# Altium PCB SLA3000-FPGA.PcbDoc (part 2 of 2)
Units mil, origin at the board's own origin, x right, y up, seen from the top; angles counter-clockwise.
Board outline 1712 x 964 mil, 4 copper layers (Top Layer, Ground, Power, Bottom Layer), stack 62.2 mil thick; 81 components, 60 nets, 407 pads, 100 vias.
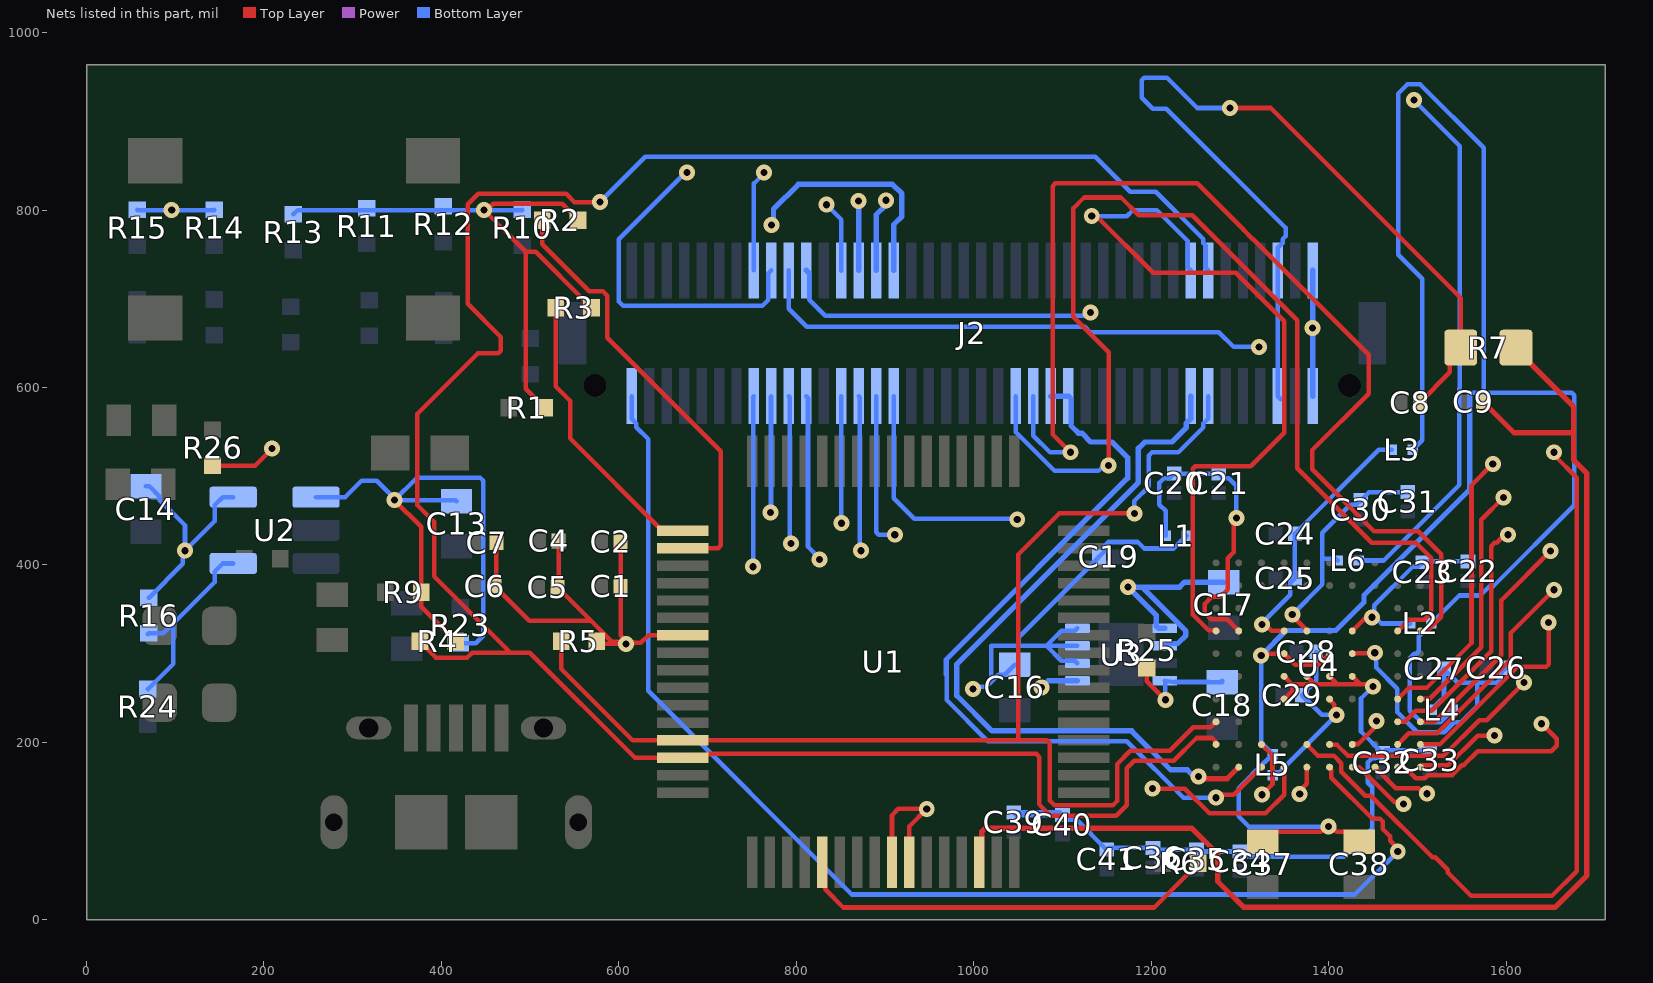
[diagram p4: the nets of this part, all layers, seen from the top]

## Via types
v1: diameter 18, hole 8, Top Layer to Bottom Layer, 100 vias

## Nets (pads, with @x,y where several pads share a name; then routed paths per layer and width w, separated by ;. In a path a pad name is that pad's centre, name@x,y a point inside that pad or via, vN(x,y) a via of type N, cw(c..) or ccw(c..) an arc to the next point about the centre after c; other vN are vias at no path point) (continued)
NetR2_1: R2.1 U1.2 | length 503.4
  Top Layer w5.12: R2.1@513.61,788.72 513.61,761.27 566.48,708.4 582.05,708.4 587.07,703.39 587.07,676.61 587.07,655.93 714.97,528.03 714.97,421.95 711.98,418.95 U1.2@672.09,418.95
NetR3_1: R3.1 U1.1 | length 324.2
  Top Layer w5.12: R3.1@528.84,690 528.84,601.16 545,585 545,542.6 648.96,438.64 U1.1@672.09,438.64
NetR6_2: R6.2 U1.21 | length 482.3
  Top Layer w5.12: U1.21@829.1,65.09 832.45,61.74 832.45,34.39 852.95,13.88 1203.53,13.88 1253.16,63.51 R6.2@1253.16,64
NetR7_2: C9.2 R7.2 U1.30 | length 1534.2
  Top Layer w6: U1.30@1006.27,65.09 1009.17,67.99 1009.17,99.61 1012.69,103.12 1245.95,103.12 1275.05,74.03 1275.05,43.32 1304.37,14 1655,14 1691,50 1691,503.22 1676,518.22 1676,547.57 ; C9.2@1574.05,584 1574.05,583.61 1578.92,578.73 1579.31,578.73 1609.1,548.95 1674.62,548.95 1676,547.57 ; R7.2@1611.1,645 1611.1,643.43 1676,578.53 1676,547.57
NetR16_1: R16.1 R24.2 U2.4 | length 222.1
  Bottom Layer w5.12: R24.2@69,260.16 69.49,260.16 98,288.67 98,332.08 96.91,333.16 ; R16.1@69,321.84 R16.1@70,322.84 86.59,322.84 96.91,333.16 ; U2.4@165.35,401.6 153.51,401.6 144.28,392.38 144.28,380.54 96.91,333.16
P1P2V: C16.2 C19.2 C37.2 C38.2 L1.1 L2.1 L3.1 L4.1 L5.1 U3.6 U3.7 U3.8 U4.E4 U4.E6 | length 2936.6
  Top Layer w5.12: C37.2@1325.59,88.18 1336.81,99.4 1390.92,99.4 1396.51,105 v1(1400,105) 1403.49,105 1409.08,99.4 1423.37,99.4 C38.2@1434.59,88.18 ; v1@1325.64,299.64 U4.E4@1349.46,299.64 ; U4.E4@1349.82,300 1362.31,287.5 1388.5,287.5 U4.E6@1401,300
  Top Layer w6: v1(1324,298) v1@1325.64,299.64 ; U4.E4@1349.46,299.64 U4.E4@1349.82,300
  Bottom Layer w5.12: v1(999,260) 1001.46,262.46 1013.83,262.46 1019.72,268.36 ; C16.2@1046,287.59 1034.78,276.37 1027.74,276.37 1019.72,268.36 ; U3.6@1116.79,289.16 1113.83,292.11 1098.7,292.11 1081.97,308.84 ; U3.7@1116.79,308.84 1081.97,308.84 ; U3.8@1116.79,328.53 1113.83,325.57 1098.7,325.57 1081.97,308.84 ; L1.1@1239.81,433 1230.65,423.84 1230.65,423.55 1225.64,418.54 1192.27,418.54 1184.98,425.83 1151.6,425.83 1146.29,420.51 1146.29,414.32 C19.2@1140.98,409 1140.98,408.61 1050.84,318.47 1050.84,308.84 ; v1(1324,298) 1324,199.81 L5.1@1337,186.81 1327.84,177.65 1327.55,177.65 1298.44,148.55 1298.44,116.73 1310.17,105 v1(1400,105) ; L3.1@1494.81,530 1505.4,540.58 1505.4,722.45 1478.44,749.41 1478.44,931.27 1488.73,941.56 1503.27,941.56 1574.81,870.03 1574.81,594.19 ; L4.1@1539.81,237 1530.65,227.84 1529.55,226.74 1529.55,226.45 1525.64,222.54 1504.64,222.54 1491.52,235.65 1491.52,294.81 1496.53,299.83 1498.64,299.83 1501.64,302.82 1501.64,319.54 1512.46,330.36 1512.46,330.65 L2.1@1515.81,334 1547.35,365.54 1570.85,365.54 1581.48,376.17 1585.73,376.17 1677,467.44 1677,591.19 1674,594.19 1574.81,594.19 ; 1559,594.19 1574.81,594.19 ; 1019.72,268.36 1019.72,308.84 1050.84,308.84 ; 1050.84,308.84 1081.97,308.84
  Bottom Layer w6: v1(1324,298) 1352,326 1408,326 1439.91,357.91 1439.91,365.8 1559,484.89 1559,594.19
"P1P2V GPLL": C28.2 C29.2 L5.2 U4.G6 | length 225.2
  Top Layer w5.12: U4.G6@1401,248.82 1401,248.07 1406.54,242.54 1406.54,233.46 v1(1409,231)
  Bottom Layer w5.12: L5.2@1337,163.19 1340.35,166.54 1344.54,166.54 1350.35,172.35 v1(1409,231) 1392.02,231 1375.73,247.29 1375.34,247.29 1370.02,252.61 C29.2@1370.02,253 1370.02,253.39 1386.02,269.39 C28.2@1386.02,302
"P1P2V PHY0": C26.2 C27.2 L4.2 U4.E7 | length 387.5
  Top Layer w5.12: U4.E7@1426.59,300 1427.09,300.5 1451.5,300.5 v1(1452,301)
  Bottom Layer w5.12: v1(1452,301) 1453.51,299.49 1453.51,284.32 1477.25,260.58 1477.25,234.2 1500.03,211.42 1530.24,211.42 1541.36,222.54 1549.26,222.54 1567.4,240.68 1567.4,267.17 ; L4.2@1516.19,237 1525.35,246.16 1525.35,246.45 1530,251.1 C27.2@1530,282.61 ; C27.2@1524.68,277.69 C27.2@1530,283 C27.2@1530,282.61 ; C26.2@1600,284 1594.68,278.69 1594.68,272.49 1589.37,267.17 1567.4,267.17 ; C27.2@1530,282.61 1545.43,267.17 1567.4,267.17
"P1P2V PHY1": C24.2 C25.2 L3.2 U4.D4 | length 294
  Top Layer w5.12: v1(1325,333) 1328.49,333 1335.9,325.59 U4.D4@1349.82,325.59
  Bottom Layer w5.12: v1(1325,333) 1325,334.83 1356.71,366.54 1356.71,379.69 C25.2@1362.02,385 C24.2@1362.02,435 1362.02,435.39 1456.63,530 L3.2@1471.19,530
"P1P2V PLL0": C22.2 C23.2 L2.2 U4.D7 | length 215.6
  Top Layer w5.12: U4.D7@1426.59,325.59 1439.54,338.54 1446.54,338.54 v1(1449,341)
  Bottom Layer w5.12: L2.2@1492.19,334 1459.49,334 1452.49,341 v1(1449,341) 1451.46,343.46 1451.46,354.69 1494.49,397.71 1500.68,397.71 C23.2@1506,403.02 1507,404.02 C22.2@1557,404.02
"P1P2V PLL1": C20.2 C21.2 L1.2 U4.D2 | length 369.9
  Top Layer w5.12: v1(1296,453) 1292.82,449.82 1292.82,414.22 1286.14,407.54 1286.14,372.19 1277.92,363.98 1268.17,363.98 1260.55,356.36 1260.55,346.01 1267.87,338.69 1285.54,338.69 U4.D2@1298.64,325.59
  Top Layer w6: U4.D2@1298.13,325.59 U4.D2@1298.64,325.59
  Bottom Layer w5.12: L1.2@1216.19,433 1216.19,460.86 1209.17,467.88 1209.17,492.4 1214.49,497.71 1220.68,497.71 C20.2@1226,503.02 C21.2@1276,503.02 1281.32,497.71 1287.51,497.71 1296,489.22 v1(1296,453)
P1P8V: C17.2 J2.79 J2.80 U3.1 U3.2 U3.5 | length 467.2
  Bottom Layer w6: v1(1076.21,262) 1083.68,269.47 U3.5@1116.79,269.47 ; U3.2@1215.21,308.84 1217.72,311.35 1229.9,311.35 1239.06,320.51 1239.06,325.49 1189.54,375 ; U3.1@1215.21,328.53 1208.13,328.53 1205.61,331.04 1205.61,343.39 v1(1174,375) 1189.54,375 ; C17.2@1282,380.59 1237.59,380.59 1232,375 1189.54,375 ; J2.79@1382.19,590.22 1382.09,590.32 1382.09,666.91 v1(1382,667) 1382.09,667.09 1382.09,731.86 J2.80@1382.19,731.95
P2P5V: C14.2 L6.1 R16.2 U2.5 | length 862.3
  Bottom Layer w5.12: C14.2@67,488.59 70.94,488.59 82.16,477.37 82.16,473.43 111,444.59 v1(111,416) ; R16.2@70,363.16 70.49,363.16 108.54,401.2 108.54,413.54 v1(111,416) ; U2.5@165.35,476.4 153.51,476.4 144.28,467.18 144.28,449.28 v1(111,416) ; L6.1@1430.46,408.35 L6.1@1433.81,405 1462.27,405 1547.44,490.17 1547.44,598.98 1548,599.54 1548,872 v1(1496,924)
"P2P5V AUX": C30.2 C31.2 L6.2 U4.D5 | length 264.5
  Top Layer w5.12: v1(1359,344) 1359,342.75 1375.41,326.34 U4.D5@1375.41,325.59
  Bottom Layer w5.12: v1(1359,344) 1392.98,377.98 1392.98,407.07 ; L6.2@1410.19,405 1408.11,407.07 1392.98,407.07 ; C31.2@1489,482.02 1445.42,482.02 1436.39,473 C30.2@1436,473 1430.68,467.69 1424.49,467.69 1392.98,436.17 1392.98,407.07
"P3P3V FT": C1.2 C2.2 C4.2 C5.2 C6.2 C7.2 C8.2 C13.2 C18.2 C32.2 C33.2 C34.2 C35.2 C36.2 C39.2 C40.2 C41.2 J2.75 J2.76 R1.2 R2.2 R3.2 R4.2 R5.2 R7.1 R9.2 R10.2 R11.2 R12.2 R13.2 R14.2 R15.2 R23.1 R25.2 R26.2 U1.7 U1.25 U1.26 U2.1 U3.4 U4.F4 U4.F5 U4.F6 U4.F7 U4.G4 | length 4362.3
  Top Layer w5.12: R26.2@142,512 190,512 v1(209,531) ; v1(347,473) 377.16,442.84 R9.2@377.16,369 377.16,353 408.87,321.28 409.37,321.28 416.16,314.49 R4.2@416.16,314 ; C7.2@462.02,425 462.02,378 C6.2@460.02,376 460.02,375.61 465.34,370.29 465.73,370.29 498.92,337.1 568.53,337.1 ; R1.2@516.16,577 516.16,577.49 495,598.65 495,753 ; C4.2@532.02,427 532.02,375.61 531.02,374.61 568.53,337.1 ; R2.2@553.92,788.72 553.92,789.22 536.01,807.13 458.61,807.13 451.49,800 v1(448,800) 495,753 ; R3.2@569.16,690 569.16,690.49 562.37,697.28 561.87,697.28 506.16,753 495,753 ; R5.2@575.16,314 578.16,311 v1(608,311) ; C2.2@602.05,426 C1.2@602.05,376 602.05,320.44 608,314.49 v1(608,311) ; U1.7@672.09,320.53 633,320.53 624.68,312.21 609.21,312.21 v1(608,311) ; U1.25@907.84,65.09 907.84,117.84 915,125 v1(947,125) 927.53,105.53 U1.26@927.53,65.09 ; R25.2@1195,283.84 1195,269 v1(1216,248) ; v1(1289,915) 1334.72,915 1548.9,700.83 R7.1@1548.9,645 1536.65,632.76 1536.65,617 1503.05,583.39 C8.2@1503.05,583 ; U4.G4@1349.82,248.82 1358.76,257.76 1358.76,265.46 ; U4.F4@1349.82,274.41 1358.76,265.46 ; U4.F5@1375.41,274.41 1384.35,265.46 ; U4.F6@1401,274.41 1409.94,265.46 ; U4.F7@1426.59,274.41 1435.54,265.46 ; v1(1450,263) 1447.54,265.46 1435.54,265.46 ; 568.53,337.1 592.17,313.46 605.54,313.46 v1(608,311) ; 1358.76,265.46 1384.35,265.46 ; 1384.35,265.46 1409.94,265.46 ; 1409.94,265.46 1435.54,265.46
  Power w5.12: v1@1287.5,916.5 v1(1289,915)
  Bottom Layer w5.12: R15.2@57.36,800.16 57.52,800 v1(96,800) 143.93,800 R14.2@144.09,800.16 ; R13.2@233,795.16 237.84,800 v1(448,800) 490.84,800 R10.2@491,800.16 ; U2.1@258.65,476.4 291.4,476.4 310,495 327,495 347,475 v1(347,473) ; C13.2@417,472 416,473 v1(347,473) ; R23.1@421,311.84 438.84,311.84 447,320 447,495 444,498 372,498 v1(347,473) ; v1(1216,248) 1216,268.69 U3.4@1215.21,269.47 1226.63,268.03 1264.84,268.03 C18.2@1280,267.59 ; C35.2@1251,79.02 1204,79.02 C36.2@1202,81.02 1152,81.02 C41.2@1150,79.02 1149.61,79.02 1115.92,112.71 1105.32,112.71 C40.2@1100,118.02 ; C35.2@1251,80.02 1254,77.02 C34.2@1300,77.02 1305.32,71.71 1308.41,71.71 1308.71,71.41 1311.81,71.41 1312.22,71 1417.28,71 1449.19,102.91 1449.19,149.54 1444.17,154.56 1444.17,177.4 1449.19,182.41 1452.29,182.41 1452.59,182.71 1455.68,182.71 C32.2@1461,188.02 1464,191.02 C33.2@1514,191.02 ; C18.2@1279.04,268.88 C18.2@1280,269.59 ; v1(1289,915) 1252,915 1217.67,949.33 1192.18,949.33 1189.19,946.33 1189.19,926.75 1201.73,914.21 1217.07,914.21 1351.39,779.89 1351.39,770.34 1348.04,766.99 1348.04,762.76 1342.82,757.54 J2.76@1342.82,731.95 J2.75@1342.82,590.22 J2.75@1346.17,586.87 ; v1(1450,263) 1436.44,249.44 1436.44,212.19 C32.2@1460.61,188.02 ; C40.2@1100,118.02 1048,118.02 C39.2@1045,121.02 1097,121.02 C40.2@1100,118.02
RX: J2.65 U4.K2 | length 826.3
  Top Layer w6: v1(1253.22,161.54) 1255.65,159.11 1285.7,159.11 U4.K2@1298.64,172.05
  Bottom Layer w6: J2.65@1244.39,590.22 1244.39,564.63 1239.61,559.85 1239.61,558.21 1239.61,555 1223.22,538.61 1192.78,538.61 1185.5,531.33 1185.5,492.91 981,288.41 981,252.54 1020.54,213 1178,213 1222,169 1240.62,169 1248.08,161.54 v1(1253.22,161.54)
SCL: J2.67 R5.1 U1.13 U4.H1 | length 1477.9
  Top Layer w5.12: R5.1@534.84,314 534.84,283.02 615.44,202.42 U1.13@672.09,202.42 1050,202.42 ; v1(1181,458) 1096.23,458 1050,411.77 1050,202.42 ; U4.H1@1273.05,223.23 1266.75,216.93 1247.39,216.93 1220.9,190.44 1176.44,190.44 1161.5,175.5 1161.5,133.91 1156.49,128.9 1091.33,128.9 1085.88,134.35 1085.88,198.91 1082.36,202.42 1050,202.42
  Bottom Layer w5.12: v1(1181,458) 1181,472.06 1197.06,488.12 1197.06,523.2 1200.91,527.05 1230.73,527.05 1258.86,555.18 1258.86,558.29 1258.86,559.41 1264.08,564.63 J2.67@1264.08,590.22
SDA: J2.68 R4.1 U1.14 U4.J1 | length 2635.2
  Top Layer w5.12: R4.1@375.84,314 375.84,313.51 393.75,295.6 429.05,295.6 434.65,301.19 477.81,301.19 ; v1(578.59,808.94) 549.92,808.94 540.62,818.24 441.41,818.24 429.55,806.39 429.55,694.28 467,656.83 467,641.44 464,638.44 441.16,638.44 373,570.28 373,467.44 392,448.44 392,387 477.81,301.19 ; U1.14@672.09,182.73 618.16,182.73 499.7,301.19 477.81,301.19 ; U1.14@674.99,185.64 700.27,185.64 701.64,187 1070.36,187 1073.88,183.49 1073.88,130 1086.54,117.34 1160.65,117.34 1172.62,129.3 1172.62,170.9 1181.05,179.32 1225.5,179.32 1251.11,204.93 1268.6,204.93 1272.69,200.84 U4.J1@1272.69,198
  Top Layer w6: U1.14@672.09,182.73 U1.14@674.99,185.64 ; U4.J1@1272.69,198 U4.J1@1273.05,197.64
  Bottom Layer w5.12: v1(578.59,808.94) 629.65,860 1137.02,860 1176.37,820.65 1205.21,820.65 1258.86,766.99 1258.86,763.89 1258.86,762.76 1261.17,760.45 J2.68@1261.17,734.86
  Bottom Layer w6: J2.68@1261.17,734.86 J2.68@1264.08,731.95
TX: J2.66 U4.D1 | length 869.7
  Top Layer w5.12: v1(1133,793.06) 1138.38,793.06 1202.32,729.12 1295.44,729.12 1350,674.56 1350,549.17 1312.12,511.28 1249.75,511.28 1246.76,508.29 1246.76,344.08 1264.72,326.12 1272.52,326.12 U4.D1@1273.05,325.59
  Bottom Layer w5.12: v1(1133,793.06) 1172.57,793.06 1179.51,800 1206.17,800 1241.05,765.12 1241.05,735.3 J2.66@1244.39,731.95
VIN_ACLK: J2.1 U4.K6 | length 1431.8
  Top Layer w5.12: U4.K6@1401,172.05 1401,171.3 1402.98,169.32 1402.98,160.3 1449.39,113.88 1457.87,113.88 1460.87,110.88 1460.87,102.41 1469.33,93.95 1469.33,88.94 1477.88,80.38 v1(1477.88,76.9)
  Bottom Layer w5.12: J2.1@614.47,590.22 614.47,564.63 619.69,559.41 619.69,555.18 633,541.87 633,258 862.44,28.56 1429.55,28.56 v1(1477.88,76.9)
VIN_D0: J2.32 U4.K4 | length 469.8
  Top Layer w5.12: v1(1201.3,147.87) 1237.84,147.87 1265.66,120.05 1328.88,120.05 1349.82,140.99 U4.K4@1349.82,172.05
  Bottom Layer w6: v1(772,783) 774.25,785.25 774.25,801 802.25,829 908.46,829 919,818.46 919,792.63 909.75,783.37 J2.32@909.75,731.95
VIN_D1: J2.31 U4.K9 | length 495.8
  Top Layer w5.12: U4.K9@1477.77,172.05 1485.69,172.05 1498.19,159.55 1508.54,159.55 1511.89,162.91 1539.07,162.91 1550.19,174.02 1552.02,174.02 1568,190 1651,190 1657,196 1657,204 v1(1640,221)
  Bottom Layer w5.12: J2.31@909.75,590.22 909.75,475.25 932.82,452.18 1047.82,452.18 v1(1049,451)
VIN_D2: J2.30 U4.J5 | length 960.1
  Top Layer w5.12: U4.J5@1375.41,197.64 1387.91,185.14 1405.58,185.14 1414.09,176.62 1414.09,166.87 1441.09,139.88 1447.6,139.88 1517.02,70.46 1520.1,70.46 1534.12,56.44 1534.12,53.36 1560.47,27 1651.65,27 1679.44,54.79 1679.44,498.43 1654,523.87 v1(1654,527)
  Bottom Layer w6: J2.30@890.06,731.95 890.06,794.92 901,805.86 v1(901,811)
VIN_D3: J2.29 U4.K10 | length 273.8
  Top Layer w5.12: U4.K10@1503.36,172.05 1504.11,172.05 1506.08,174.02 1534.46,174.02 1568,207.56 v1(1587,207.56)
  Bottom Layer w5.12: J2.29@890.06,590.22 890.06,436.94 893.06,433.94 910.94,433.94 v1(911,434)
VIN_D4: J2.28 U4.K5 | length 111.6
  Top Layer w5.12: v1(1367.38,142) 1367.38,145.49 1375.41,153.52 U4.K5@1375.41,172.05
  Bottom Layer w6: v1(870,810) 870.19,809.81 870.19,732.14 J2.28@870.38,731.95
VIN_D5: J2.27 U4.J10 | length 404.4
  Top Layer w5.12: U4.J10@1503.36,197.64 1525.25,197.64 1612.62,285 1645,285 1648,288 v1(1648,335)
  Bottom Layer w5.12: J2.27@870.38,590.22 871.69,588.91 871.69,417.31 v1(873,416)
VIN_D6: J2.26 U4.J3 | length 148.3
  Top Layer w5.12: U4.J3@1324.23,197.64 1336.72,185.14 1336.72,152.86 1325,141.14 v1(1325,141)
  Top Layer w6: U4.J3@1324,197.27 1324,197.41 U4.J3@1324.23,197.64
  Bottom Layer w5.12: v1(834,806) 850.69,789.31 J2.26@850.69,731.95 J2.26@850.85,731.8
VIN_D7: J2.25 U4.J9 | length 409.3
  Top Layer w5.12: U4.J9@1477.77,197.64 1490.39,210.26 1522.15,210.26 1605.47,293.58 1605.47,323.47 v1(1654,372)
  Bottom Layer w5.12: J2.25@850.69,590.22 850.85,590.07 850.85,447.15 v1(851,447)
VIN_D8: J2.22 U4.J6 | length 619.3
  Top Layer w5.12: U4.J6@1401,197.64 1401.53,197.11 1409.45,197.11 1421.41,185.14 1529.86,185.14 1569.78,225.06 1577.99,225.06 v1(1620.37,267.44)
  Bottom Layer w5.12: J2.22@814.23,729.05 814.67,728.61 814.67,698.79 832.68,680.78 1124.27,680.78 1128.19,684.7 v1(1131.68,684.7)
  Bottom Layer w6: J2.22@811.32,731.95 J2.22@814.23,729.05
VIN_D9: J2.21 U4.H10 | length 453.1
  Top Layer w5.12: U4.H10@1503.36,223.23 1519.4,223.23 1594.35,298.18 1594.35,328.08 1594.35,359.97 v1(1650.19,415.81)
  Bottom Layer w5.12: J2.21@811.32,590.22 813.16,588.38 813.16,420.37 826,407.53 v1(826,406)
VIN_D10: J2.20 U4.K7 | length 665.9
  Top Layer w5.12: U4.K7@1426.59,172.05 1434.51,172.05 1473.65,132.91 1482.06,132.91 v1(1484.52,130.44)
  Bottom Layer w5.12: J2.20@791.64,731.95 791.64,688.74 811.94,668.45 1125.05,668.45 1131.05,662.44 1276.28,662.44 1293.04,645.68 v1(1321.32,645.68)
VIN_D11: J2.19 U4.H9 | length 448.1
  Top Layer w5.12: U4.H9@1477.77,223.23 1485.69,223.23 1498.19,235.72 1516.17,235.72 1583.24,302.79 1583.24,348.96 1583.24,421.24 1586.86,424.86 1589.37,424.86 1598.51,434 v1(1602,434)
  Bottom Layer w5.12: J2.19@791.64,590.22 792.82,589.04 792.82,425.18 v1(794,424)
VIN_D12: J2.18 U4.J7 | length 427.8
  Top Layer w5.12: U4.J7@1426.59,197.64 1427.12,198.17 1433.45,198.17 1451.54,216.25 1451.54,221.54 v1(1454,224)
  Bottom Layer w5.12: v1(677,842.44) 675.46,842.44 600.01,766.99 600.01,696.91 605.02,691.9 761.72,691.9 768.61,698.79 768.61,728.61 J2.18@771.95,731.95
VIN_D13: J2.17 U4.G10 | length 403.5
  Top Layer w5.12: U4.G10@1503.36,248.82 1503.89,249.35 1514.07,249.35 1572.12,307.39 1572.12,451.12 v1(1597,476)
  Bottom Layer w5.12: v1(771,459) 771.48,459.48 771.48,589.74 J2.17@771.95,590.22
VIN_D14: J2.16 U4.K8 | length 186
  Top Layer w5.12: U4.K8@1452.18,172.05 1475.8,148.43 1501.3,148.43 1507.61,142.13 v1(1510.74,142.13)
  Bottom Layer w5.12: J2.16@752.27,731.95 752.27,829.98 763.39,841.1 v1(763.39,842.44)
VIN_D15: J2.15 U4.G9 | length 514
  Top Layer w5.12: U4.G9@1477.77,248.82 1490.27,261.31 1510.31,261.31 1561,312 1561,489.87 v1(1585,513.87)
  Bottom Layer w5.12: v1(751,398) 751.63,398.63 751.63,589.59 J2.15@752.27,590.22
VINA_FLD: J2.49 J2.51 U4.K3 | length 905.8
  Top Layer w5.12: v1(1272.93,137.61) 1276.25,140.93 1293.11,140.93 U4.K3@1324.23,172.05
  Bottom Layer w5.12: 969,276.85 969.44,276.41 969.44,247.76 1015.76,201.44 1172.56,201.44 1236.39,137.61 v1(1272.93,137.61)
  Bottom Layer w6: 969,276.85 969,293.38 1173.5,497.88 1173.5,520.91 1155.8,538.61 1131.73,538.61 1121.84,548.5 1117.88,548.5 1109.5,556.87 1109.5,587.32 J2.51@1106.6,590.22 J2.49@1086.91,590.22
VINA_HSYNC: J2.45 U4.D9 | length 1255.2
  Top Layer w5.12: v1(1152,512) 1152,639.55 1111.94,679.61 1111.94,801.78 1124.28,814.12 1165.88,814.12 1186,794 1246.28,794 1364.44,675.84 1364.44,509 1448.44,425 1498.4,425 1515.86,407.54 1515.86,346.01 1507.94,338.09 1490.27,338.09 U4.D9@1477.77,325.59
  Bottom Layer w5.12: J2.45@1047.54,590.22 1047.54,549.73 1091.34,505.94 1140.56,505.94 1146.62,512 v1(1152,512)
VINA_VSYNC: J2.47 U4.D10 | length 1281.4
  Top Layer w5.12: v1(1109,527) 1089,547 1089,827 1092,830 1252,830 1304.16,777.84 1304.16,777.45 1314.45,767.16 1314.84,767.16 1445.09,636.91 1445.09,593.1 1381.44,529.46 1381.44,507.73 1451.17,438 1501.12,438 1526.98,412.14 1526.98,341.4 1511.69,326.12 1503.89,326.12 U4.D10@1503.36,325.59
  Bottom Layer w5.12: J2.47@1067.23,590.22 1067.23,545.77 1086,527 v1(1109,527)
pads on no net: J1.S1 J1.S2 J1.S3 J1.S4 J1.S5 J1.S6 J2.2 J2.5 J2.6 J2.7 J2.8 J2.9 J2.10 J2.11 J2.12 J2.35 J2.36 J2.37 J2.38 J2.39 J2.40 J2.41 J2.42 J2.46 J2.48 J2.50 J2.52 J2.55 J2.56 J2.57 J2.58 J2.59 J2.60 J2.61 J2.62 J2.H1 J2.H2 J2.M1 J2.M2 U1.4 U1.5 U1.8 U1.9 U1.10 U1.11 U1.12 U1.15 U1.16 U1.17 U1.29 U1.31 U1.32 U1.33 U1.34 U1.35 U1.36 U1.37 U1.38 U1.39 U1.40 U1.41 U1.42 U1.43 U1.44 U1.45 U1.46 U1.47 U1.48 U1.49 U1.50 U1.51 U1.52 U1.53 U1.54 U1.55 U1.56 U1.57 U1.58 U1.59 U1.60 U1.61 U1.62 U1.63 U1.64 U4.A1 U4.A2 U4.A3 U4.A4 U4.A5 U4.A6 U4.A7 U4.A8 U4.A9 U4.A10 U4.B1 U4.B2 U4.B3 U4.B4 U4.B5 U4.B6 U4.B7 U4.B8 U4.B9 U4.B10 U4.E9 U4.E10 U4.G1 U4.J4 U4.J8 U4.K1

## Polygon pours and split planes (outlines as drawn)
P1P2V on Power "P1P2V-pwrlayer" (solid, pour order 9): 1157,317 1069,229 1022,276 977,276 1069,211 1138,280 1342,280 1342,317
VIN_D8 on Power "VIN_D8" (solid, pour order 36): 1650,285 1650,245 1647,248 1533,248 1533,356 1470.95,424.05 1467.95,421.05 ccw(c1460.86,413.98) 1460.83,423.99 cw(c1460.82,454.08) 1435.72,437.49 cw(c1507.38,484.91) 1426.84,514.85 ccw(c1335.22,554.37) 1435,554.42 cw(c1451.58,554.42) 1451.58,571 ccw(c1451.58,579.42) 1460,579.42 1460,710 ccw(c1430.01,710.01) 1430,740 1260,740 1198,678 1161,676 1140,668 cw(c1136.33,704.15) 1113.36,676 cw(c1150.2,685.09) 1117.73,704.73 cw(c1135.2,687.37) 1135.2,712 1210,712 1244,746 1448.1,746 cw(c1448.13,722.17) 1465,739 cw(c1445.79,719.73) 1473,719.69 1473,574 cw(c1453,574) 1453,554 ccw(c1452.99,541.63) 1440.61,541.61 cw(c1341.57,550.3) 1435.08,516.51 1433.3,511.57 ccw(c1500.92,495.01) 1474.33,430.67 1544,361 1544,288 1550,288 1628,285
VIN_D1 on Power "VIN_D1" (solid, pour order 34): 1657,238.96 1657,199 1613,199 1613,230 1515,235 1514,347 1480.75,394.94 1457.72,407 1386.93,407 1390,493.02 ccw(c1389,519.99) 1409,501.86 1409,581 1418.62,581 ccw(c1418.62,625.38) 1450,594 ccw(c1418.7,594.03) 1440.81,616.19 1437,620 1437,691.32 ccw(c1393.48,676.43) 1394.84,722.41 1302.32,725.19 1067,437 cw(c1054.96,449) 1054.93,432 1033,432 cw(c1040.26,439.25) 1030,439.24 1030,469.58 1043.73,502.73 1204.26,663.26 cw(c1317.43,608.6) 1271.11,725.44 1288.66,734 1388.57,734 1450,708.55 1450,614.84 cw(c1409.43,594.09) 1455,594 cw(c1440.65,593.94) 1450.76,583.76 1443,576 1421,576 1421,514.14 cw(c1386.99,514.09) 1411,490 cw(c1403.79,497.17) 1403.76,487 1395,487 1395,419.83 ccw(c1401.81,419.82) 1397,415 ccw(c1401.83,419.84) 1401.83,413 1474,413 1523.87,345.73 1526.58,243.72
VIN_D3 on Power "VIN_D3" (solid, pour order 33): 1600,221 1600,194 1499,196 1495,343 1467.78,370.22 cw(c1486.56,389) 1460,389 1360.53,389 1354.73,400.39 ccw(c1277.41,456.59) 1373,456.6 1373,583 1396,609 ccw(c1329.12,677.71) 1425,676.42 1425,685 ccw(c1359.83,619.84) 1359.82,712 1311,712 1278,679 1278,585.41 cw(c1274.6,585.41) 1277,583 1252,558 1249,482 1204.7,482 ccw(c1204.69,410.32) 1154,461 1124.29,431.29 cw(c1053.58,501.99) 1053.58,402 898,402 898,447 cw(c906,447) 906,455 923,455 cw(c923,447) 931,447 931,414 1069,414 ccw(c1069,466) 1105.77,429.23 cw(c1185.77,406.15) 1203.45,487.51 1228.09,487.26 1241,488 1241,560 1243,560 1270,587 1270,682 1309,721 1367.23,721 cw(c1367.24,632.25) 1430,695 1430,668.42 cw(c1330.23,672.33) 1398,599 1383,580 1382,580 1382,399 1461,399 1473,387 1473,382.24 ccw(c1483.24,382.24) 1476,375 1506,341 1508,225
VIN_D5 on Power "VIN_D5" (solid, pour order 31): 881,438 881,392 880,391 864,391 864,593 844,613 958,727 1195,727 1198,730 1198,764 1557,764 1558,763 1556,761 1556,583 ccw(c1574.82,539.89) 1531,557 ccw(c1597.79,484.85) 1502,507 ccw(c1629.65,478.3) 1516.02,413.45 1538.15,391.01 1589.96,356 1656,356 cw(c1656,348) 1664,348 1664,320 cw(c1663,320) 1663,319 1630,319 cw(c1629.99,324.99) 1624,325 1624,342 1598.35,343.35 1595,344 cw(c1640.3,495.13) 1498,427 1491.55,460.09 cw(c1567.5,480.51) 1495,511 cw(c1587.17,490.83) 1523,560 cw(c1571,543.12) 1549,589 1550,756 1206,756 1206,722 961,721 856,615 875,595
VIN_D7 on Power "VIN_D7" (solid, pour order 30): 858,426 842,426 842,585 817,610 951,744 1180,744 1180,774 1183,777 1576,777 1576,573 ccw(c1620.24,477.84) 1517,459 ccw(c1611.91,486.36) 1611.91,387.58 ccw(c1634.61,524.33) 1657.31,387.58 ccw(c1732.68,363.45) 1654,372 cw(c1643.17,365.04) 1656,364 cw(c1641.83,513.81) 1507,447 cw(c1623.08,474.3) 1566,579 1564,769 1189,769 1189,738 1186,735 956,735 833,612 858,587 858,466
VIN_D9 on Power "VIN_D9" (solid, pour order 28): 831,395 820,395 820,581 794,607 945,758 1166,758 1166,788 1586,788 1589,561 ccw(c1609.36,483.72) 1535,513 ccw(c1657.16,489.88) 1536,462 ccw(c1572.92,467.58) 1553,436 ccw(c1600.63,500.12) 1617.99,422.15 1654.07,434.84 ccw(c1782.27,1747.83) 1663,434 ccw(c2230.16,454.34) 1664,415 ccw(c2552.83,-68.68) 1656,400 ccw(c1614.83,325.19) 1614.51,410.58 cw(c1613.79,607.78) 1535,427 cw(c1719.87,487.26) 1527.14,513 cw(c1684.82,477.64) 1533,533 cw(c1654.54,430.97) 1547.14,547.79 cw(c1638.04,426.96) 1581,566.99 1578,783 1173,783 1173,750 947,750 805,608 831,582
VIN_D11 on Power "VIN_D11" (solid, pour order 27): 801,414 789,414 789,582 769,602 938.2,773.8 1150,775 1150,797.83 1150,807 1603,807 1603,546.27 ccw(c1600.79,485.84) 1556.56,527.09 ccw(c1613.46,494.78) 1578.57,439.43 1608.84,449.68 1620.59,429.56 cw(c1602.47,449.78) 1593.09,424.3 1584.98,429 1570.25,429 cw(c1624.51,494.06) 1546.03,525.96 cw(c1596.76,491.82) 1593,552.85 1593,797.83 1159,797.83 1159,766 938.2,764 780.73,604.34 800,585 801,453
VIN_D13 on Power "VIN_D13" (solid, pour order 26): 780,438 763,438 763,580.71 746,597.71 968,819.71 1618,819.71 1618,527.9 cw(c1608.31,904.19) 1585.01,528.5 ccw(c1585.56,509.17) 1583,490 1594,485 cw(c1593.41,477.14) 1601.11,478.79 1577.65,462.87 cw(c1595.44,500.41) 1570.47,533.61 1609,536.1 1609,810.71 967,810.71 754.5,598.21 780,572.71
VIN_D15 on Power "VIN_D15" (solid, pour order 24): 1640,511.89 cw(c1633.67,525.4) 1637.22,510.91 1601.58,503.45 cw(c1586.59,512.63) 1599.38,524.69 ccw(c1612.56,535.84) 1626,546.69 1626,824 950,824 931,803 734.63,595.37 758,572 758,383 746,383 746,570 721,595 887,771 898,783 906,797 943,831 1640,831
VIN_D10 on Power "VIN_D10" (solid, pour order 29): 1476,112 1491,112 1491,330.52 1488.38,335.49 cw(c1535.54,404.46) 1455.65,380 1295,380 ccw(c1295,450) 1365,450 1365,582.24 1410.28,637.69 ccw(c1362,657) 1362,709 1323,709 1318,704 1318,674 1308,664 1296,664 1296,627 1305,627 1342,664 1339,699 1366,699 cw(c1366,662) 1403,662 1402,661 1402,647 1348,593 1348,450 cw(c1285.01,449.99) 1285,387 1285,371 1445.72,371 1476,334
P1P8V on Power "P1P8-pwrlayer" (solid, pour order 7): 1076.5,237.5 1044,270 1265,491 1265,558 1382.88,675.88 1388.5,673.55 1388.5,640.5 1273,525 1273,434
VIN_D14 on Power "VIN_D14" (solid, pour order 20): 778.75,827.75 805.54,854.54 1668,856.11 1668,189 1505,189 1505,157 1505,134 1515,134 1516.34,181 1680.98,181 1677.96,865.73 778.75,860.25 759.83,837.82
P2P5V on Power "P2P5C_pwrlayer" (solid, pour order 22): 129,398 128,397 92,397 92,545 20,617 22,619 22,954 1516.95,954 1526.42,918 1350.5,918 1312,932 57,932 57,622 134,545 129,540
VIN_D12 on Power "VIN_D12" (solid, pour order 21): 666,826 666,883.12 1693,894 1697,56 1653,12 1416,12 1416,131 1445,160 1445,227 1469,227 1472,224 1461,213 1461,141 1447,141 1425,119 1425,21 1649,21 1689,61 1689,66 1685,883 688,865.53 688,826 675,826
VIN_D6 on Power "Vin_D6" (solid, pour order 15): 595.54,816 383.68,588.32 708,264 861,264 993,119 1341.27,113.74 1333.1,159.11 1284.07,126.16 1003,132.03 992.75,132.25 865,278 706,278 423,594 604.91,801.91 840,800 839.56,816
VIN_D4 on Power "VIN_D4" (solid, pour order 17): 1367.38,142 1391,146 1354.6,196.4 1028.03,193.75 887.34,315 710.97,325.49 727,539 642,622 773,732 838,768 885,787 880,812 870,810 830,783 789,758 615,633 713,514 700.48,315 892,300 1005.86,180.68 1340.1,181.9
VIN_D2 on Power "VIN_D2" (solid, pour order 16): 1661,517 1661,847.78 896,844.99 896,797 900,797 906,797 906,839 1647.58,839 1650.35,836.49 1648,517
VIN_D0 on Power "VIN_D0" (solid, pour order 18): 1213,164 1003,164 868,299 706,299 706,300 658,361 650,457 498,609 654,765 786,772 786,793 646.79,780.34 640.21,779.21 476,615 633,458 633,372 708,288 864,288 1010,142 1213,142
"P3P3V FT" on Power "P3P3V-pwrlayer" (solid, pour order 6): 257.48,450.61 466.49,478.83 667.91,237.78 826.31,242.74 944.85,91.2 1369.31,94.86 1407,168 1436.87,241 1468.53,242.09 1466.9,274 1413,274 1405,266 1213.52,254.86 1200,246 1223.17,241 1350,249 1397.59,255.59 1424.63,255.59 1400,182 1361.69,106.69 969,106.69 969,138.2 836,257.91 690.46,254.86 463.39,500.61 276.93,486.38 117,667.97 117,786.81 514,786 629,892 1305,902 1303,931 1284,931 1247.18,921.61 607.03,903.03 500.5,796.5 482,815 81,813 80.31,786.81 87.41,635.27
GND on Ground "GND_PLANE" (solid, pour order 0): 5,960 5,5 1705,5 1705,960

## Silkscreen, mask and mechanical layers (free items; w line width, h text height)
Top Overlay:
  circle w10: c917,1031 r30.41
  text "SightLine Applications" at 769,1155.47 h40
  text "SLA-3000-FPGA" at 863,1093 h40
  text "c 2022 REV. A" at 902,1017 h40
Mechanical 1:
  circle w10: c1592.82,111.87 r66.93
  circle w10: c116.44,111.87 r66.93
Mechanical 4:
  the board outline again, w6
Mechanical 16:
  drawing of 1884 lines, arcs and shapes, not listed
  text "1" at -794.63,2925.65 h40
  text "2" at 1563.38,2925.65 h40
  text "3" at 3940.03,2925.65 h40
  text "4" at 6315.38,2925.65 h40
  text "A" at -1891.97,2035.65 h40
  text "D" at -47.97,716.65 h40
  text "1" at 1207.79,235.92 h40
  text "B" at -1891.97,159.65 h40
  text "35mil Max H" at 608.65,87.98 h40
  text "C" at -1891.97,-1716.35 h40
  text "Note:" at 2525.53,-2251.39 h40
  text "1. SOLDER MASK BOTH SIDES LPI: MATTE FINISH" at 2533.4,-2361.63 h40
  text "AND TO CONFORM TO IPC-SM-840 TYPE B1 CLASS 2, COLOR GREEN" at 2651.51,-2440.37 h40
  text "2. MATERIAL FINISH: SILVER (RoHS)" at 2533.4,-2519.11 h40
  text "3. SILKSCREEN BOTH SIDES WITH NON-CONDUCTIVE, WHITE INK. REMOVE INK ON EXPOSED CONDUCTORS." at 2531.4,-2602.59 h40
  text "4. FABRICATE PER IPC-6011 AND IPC-6012, CLASS 2 (IPC-A-600 IS ALSO ACCEPTABLE)" at 2531.4,-2681.33 h40
  text "5. CLIP SILKSCREEN THAT IS PLACED OVER EXPOSED COPPER FEATURES" at 2535,-2760 h40
  text "ENGINEER:" at 2883.03,-3139.35 h40
  text "TITLE:" at 4383.03,-3139.35 h40
  text "W. Howland" at 3225.88,-3262.25 h40
  text "SLA-3000-FPGA" at 4643.2,-3380.36 h40
  text "PCB DESIGNER:" at 2883.03,-3434.35 h40
  text "W. Howland" at 3225.88,-3577.21 h40
  text "D" at 7403.03,-3588.35 h40
  text "DATE:" at 2883.03,-3739.35 h40
  text "PART NO.:" at 4383.03,-3739.35 h40
  text "REV:" at 6483.03,-3739.35 h40
  text "Sightline Applications" at 1583.03,-3839.35 h40
  text "A" at 6729.82,-3852.8 h40
  text ".PRINT_DATE" at 2933.03,-3859.35 h40
  text "2828 SW Corbett Ave" at 1583.03,-3939.35 h40
  text "Unit #215" at 1583.03,-4039.35 h40
  text "FILE NAME:" at 2883.03,-4039.35 h40
  text "DWG NO:" at 4383.03,-4039.35 h40
  text "SCALE:" at 6483.03,-4039.35 h40
  text "Portland, OR, 97201" at 1583.03,-4139.35 h40
  text ".PCB_FILE_NAME_NO_PATH" at 2933.03,-4159.35 h40
  text "2" at 1563.38,-4374.35 h40
  text "3" at 3940.03,-4374.35 h40
  text "4" at 6315.38,-4374.35 h40

## Dimensions
2.27,3.61 to 1714.87,3.61 on Mechanical 2
0.3,964.24 to 0.3,-0.33 on Mechanical 2

## Text inside footprints (layer, text, board x,y; h text height)
J1: Mechanical 13 "PCB END" at 339.86,27.32 h19.68